# Altium PCB PCB1.PcbDoc
Units mil, origin at the board's own origin, x right, y up, seen from the top; angles counter-clockwise.
Board outline 2195 x 2205 mil, 2 copper layers (Top Layer, Bottom Layer); 21 components, 14 nets, 72 pads, 0 vias.
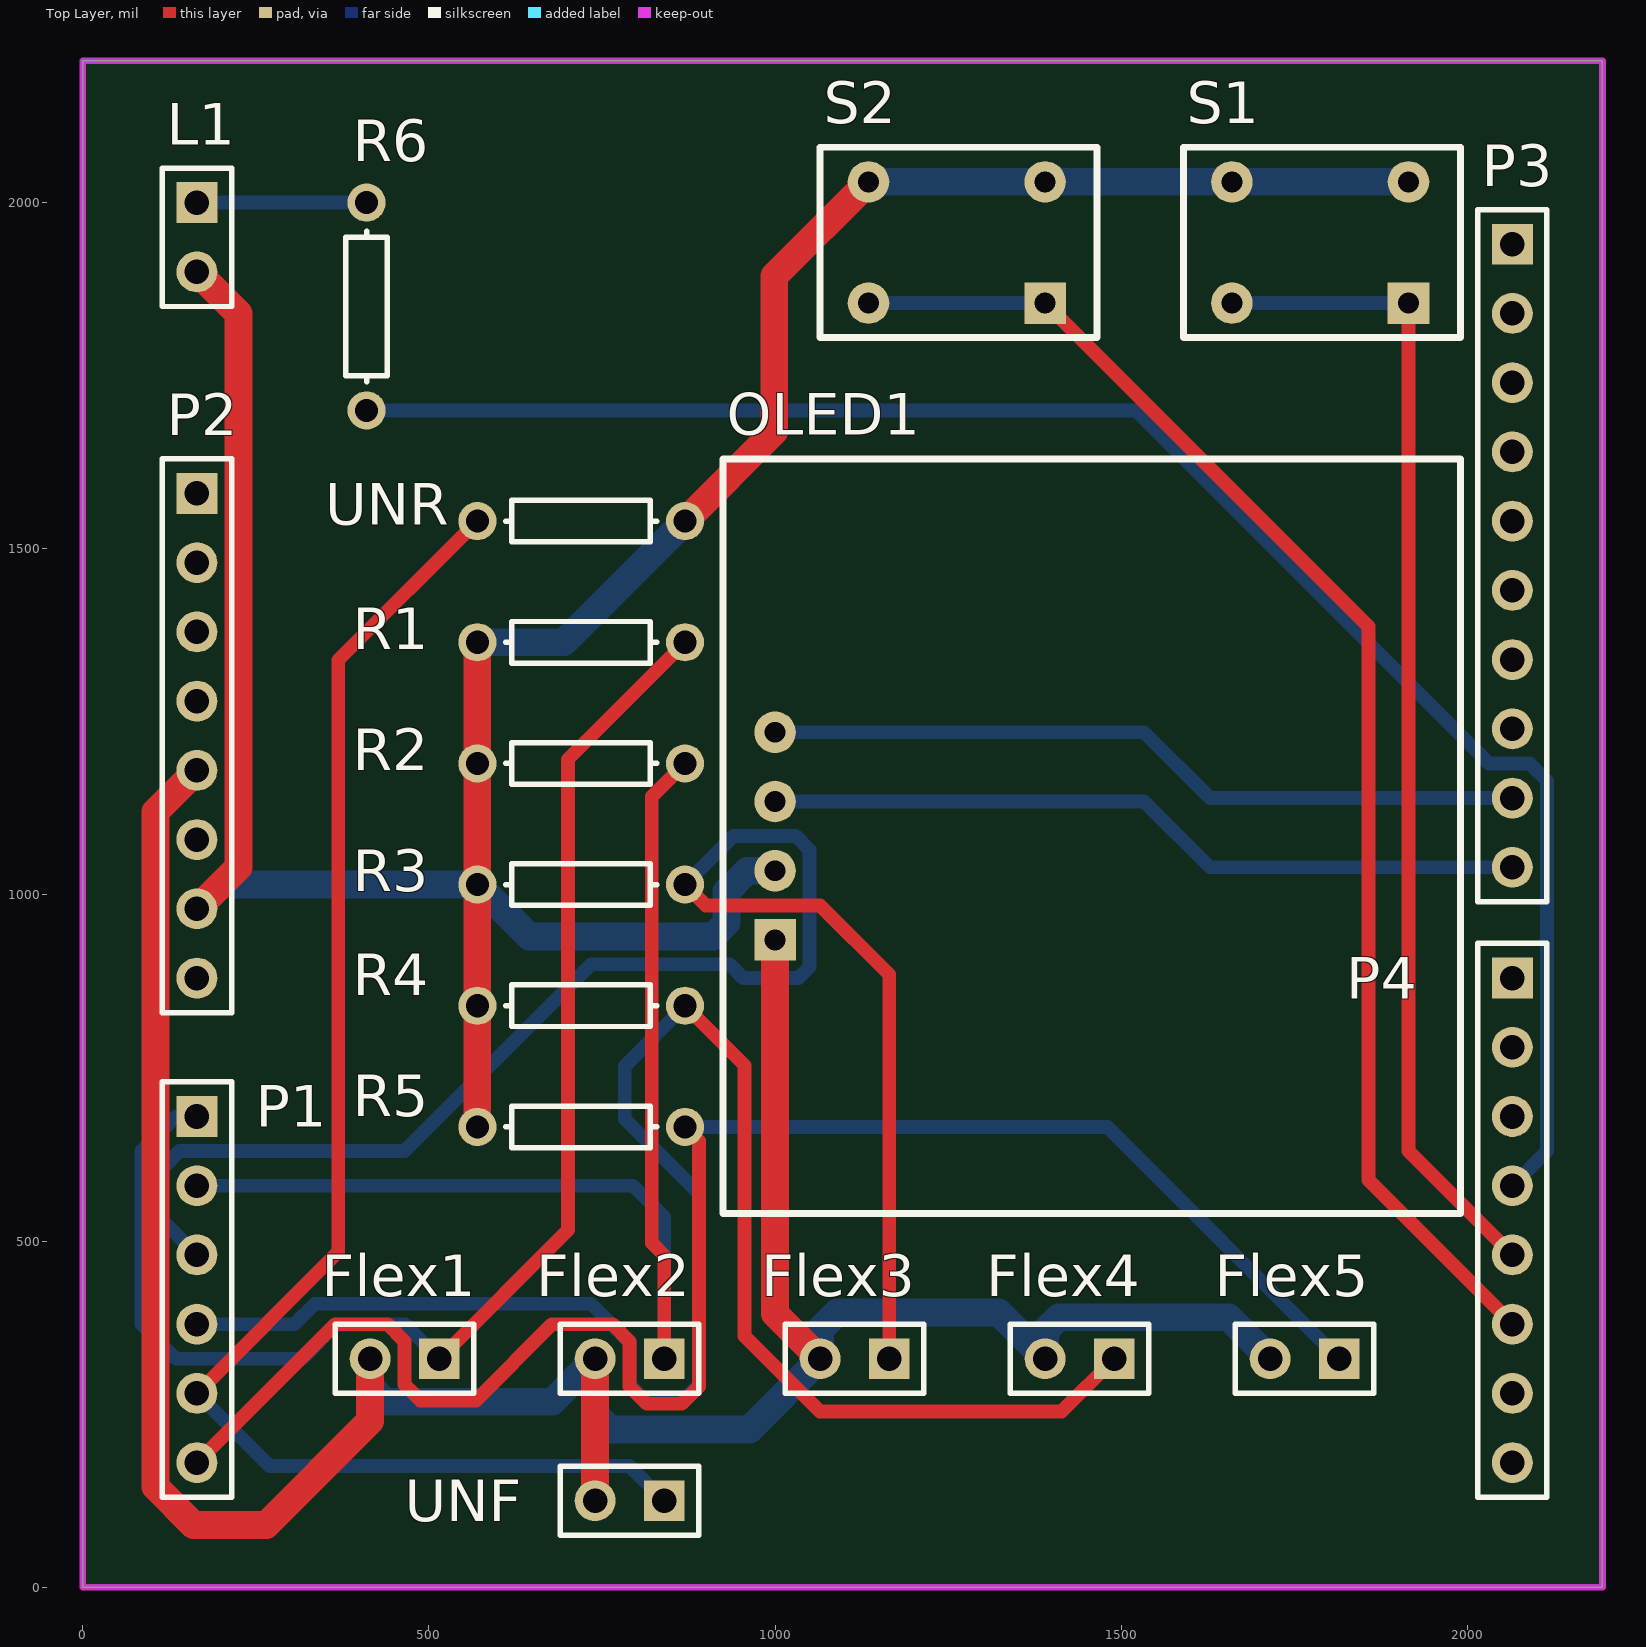
[diagram p0: Top Layer view]
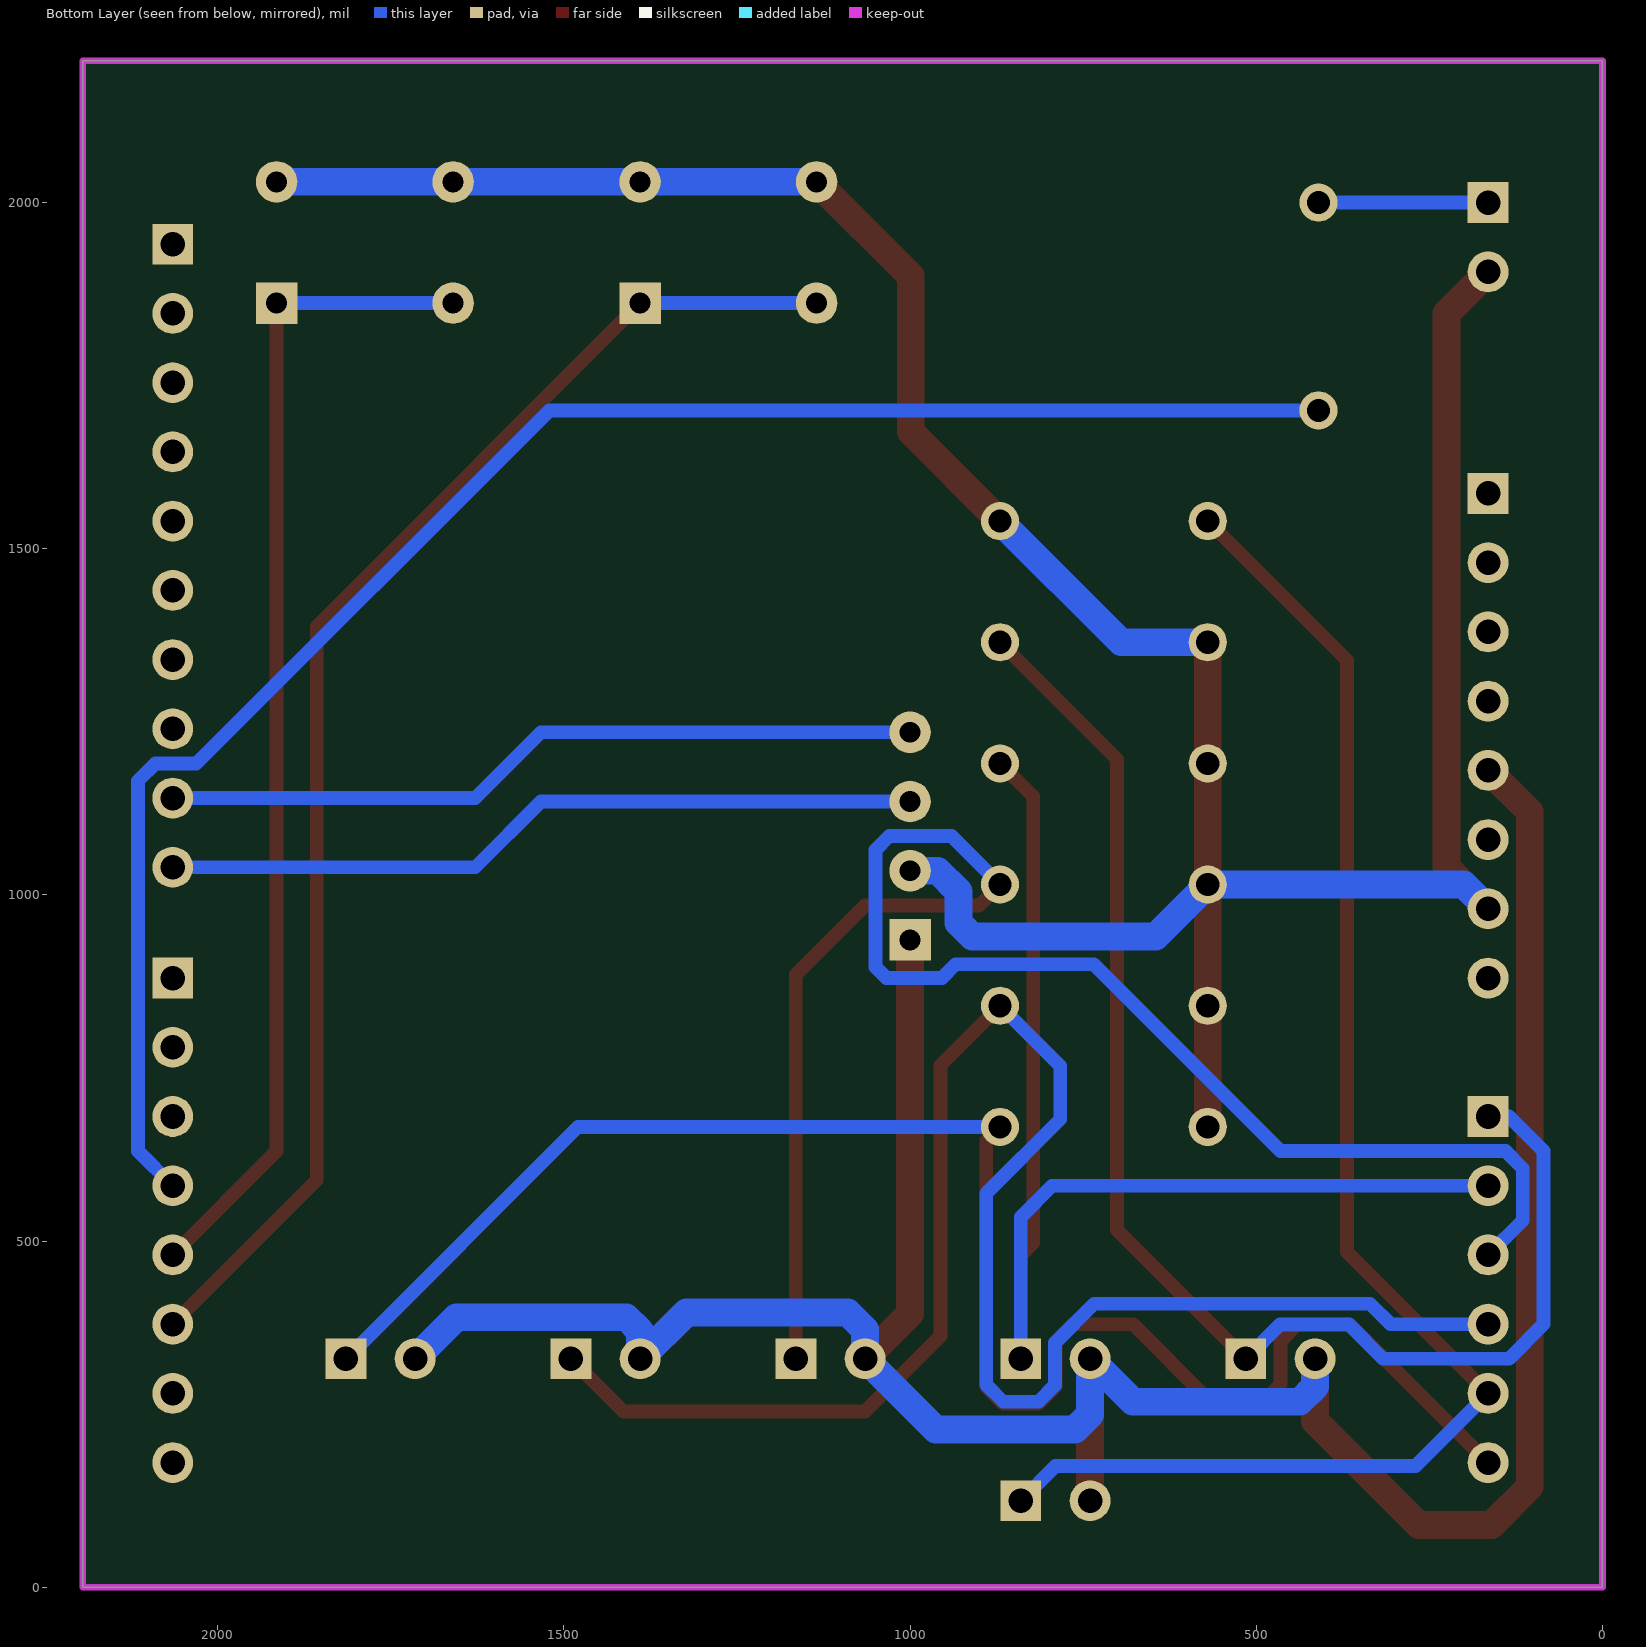
[diagram p1: Bottom Layer view, seen from below]

## Layer stack, top to bottom
Top Solder: solder mask 0.4, Solder Resist, Dk 3.5
Top Layer: signal copper 1.4
Dielectric 1: dielectric 12.6, FR-4, Dk 4.8
Bottom Layer: signal copper 1.4
Bottom Solder: solder mask 0.4, Solder Resist, Dk 3.5

## Board outline
0,0 0,2205 2195,2205 2195,0

## Design rules (kind name [scope] priority, off if disabled: settings)
Clearance [All] p1: gap=10 ignorepadtopadclearanceinfootprint=FALSE except(0: Arc-Hole Track-Hole SMDPad-Hole THPad-Hole Via-Hole Fill-Hole Poly-Hole Region-Hole Text-Hole)
PolygonConnect [All] p1: connectstyle=Relief reliefconductorwidth=10 reliefentries=4 polygonreliefangle="90 Angle" airgapwidth=10
RoutingVias [All] p1: holewidth=28 width=50 viastyle="Through Hole" minholewidth=28 minwidth=50 maxholewidth=28 maxwidth=50
SolderMaskExpansion [All] p1: expansion=4
Width Width_1 [InNet('5V')] p1: maxlimit=40 minlimit=40 preferedwidth=40 minimp=50.000000 maximp=50.000000 favimp=50.000000
Width Width_2 [InNet('GND')] p2: maxlimit=40 minlimit=40 preferedwidth=40 minimp=50.000000 maximp=50.000000 favimp=50.000000
Width [All] p3: maxlimit=20 minlimit=20 preferedwidth=20 minimp=50.000000 maximp=50.000000 favimp=50.000000
30 further rules are at their usual default settings.

## Components (designator, comment, footprint, x,y, rotation, side; value= is the part's Value field where it differs from the comment)
Flex1 "Header 2" HDR1X2 515,330 r180 top
Flex2 "Header 2" HDR1X2 840,330 r180 top
Flex3 "Header 2" HDR1X2 1165,330 r180 top
Flex4 "Header 2" HDR1X2 1490,330 r180 top
Flex5 "Header 2" HDR1X2 1815,330 r180 top
L1 "LED2" HDR1X2 165,2000 r270 top
OLED1 "OLED" OLED 1000,935 r90 top
P1 "Header 6" HDR1X6 165,680 r270 top
P2 "Header 8" HDR1X8 165,1580 r270 top
P3 "Header 10" HDR1X10 2065,1940 r270 top
P4 "Header 8" HDR1X8 2065,880 r270 top
R1 "Res1" AXIAL-0.3 720,1365 r0 top value=22K
R2 "Res1" AXIAL-0.3 720,1190 r0 top value=22K
R3 "Res1" AXIAL-0.3 720,1015 r0 top value=22K
R4 "Res1" AXIAL-0.3 720,840 r0 top value=22K
R5 "Res1" AXIAL-0.3 720,665 r0 top value=22K
R6 "Res1" AXIAL-0.3 410,1850 r90 top value=3.3K
S1 "switch" switch 1915,1855 r180 top
S2 "switch" switch 1390,1855 r180 top
UNF "Header 2" HDR1X2 840,125 r180 top
UNR "Res1" AXIAL-0.3 720,1540 r180 top value=22K

## Footprints (in the part's own frame and the unit in brackets; to place one, negate y for a bottom-side part, rotate by r counter-clockwise, add the part's x,y. Pads: shape width x height; smd on the part's side, far side on the other; paste and mask are expansions set on the pad)
AXIAL-0.3 [mm] "Axial Device, Thru-Hole; 2 Leads; 0.3 in Pin Spacing"
  round 1.4 hole 0.85: 1(-3.81,0) 2(3.81,0)
  silkscreen extent -2.77,-0.76 2.77,0.76
HDR1X2 [mm] "Connector; Header; 2 Position"
  rect 1.5x1.5 hole 0.9: 1(0,0)
  round 1.5 hole 0.9: 2(2.54,0)
  silkscreen extent -1.27,-1.27 3.81,1.27
HDR1X6 [mm] "Connector; Header; 6 Position"
  rect 1.5x1.5 hole 0.9: 1(0,0)
  round 1.5 hole 0.9: 2(2.54,0) 3(5.08,0) 4(7.62,0) 5(10.16,0) 6(12.7,0)
  silkscreen extent -1.27,-1.27 13.97,1.27
HDR1X8 [mm] "Connector; Header; 8 Position"
  rect 1.5x1.5 hole 0.9: 1(0,0)
  round 1.5 hole 0.9: 2(2.54,0) 3(5.08,0) 4(7.62,0) 5(10.16,0) 6(12.7,0) 7(15.24,0) 8(17.78,0)
  silkscreen extent -1.27,-1.27 19.05,1.27
HDR1X10 [mm] "Connector; Header; 10 Position"
  rect 1.5x1.5 hole 0.9: 1(0,0)
  round 1.5 hole 0.9: 2(2.54,0) 3(5.08,0) 4(7.62,0) 5(10.16,0) 6(12.7,0) 7(15.24,0) 8(17.78,0) 9(20.32,0) 10(22.86,0)
  silkscreen extent -1.27,-1.27 24.13,1.27
OLED [mil]
  rect 60x60 hole 30: 1(0,0)
  round 60 hole 30: 2(100,0) 3(200,0) 4(300,0)
  silkscreen extent -395,-990 695,75
switch [mil]
  rect 60x60 hole 30: 1(0,0)
  round 60 hole 30: 2(0,-175) 3(255,-175) 4(255,0)
  silkscreen extent -75,-225 325,50

## Part data
Flex1 Flex2 Flex3 Flex4 Flex5 UNF: "Header, 2-Pin", LatestRevisionDate=17-Jul-2002, LatestRevisionNote="Re-released for DXP Platform.", Publisher="Altium Limited"
L1: library part "Header 2", "Header, 2-Pin", LatestRevisionDate=17-Jul-2002, LatestRevisionNote="Re-released for DXP Platform.", Publisher="Altium Limited"
P1: "Header, 6-Pin", LatestRevisionDate=17-Jul-2002, LatestRevisionNote="Re-released for DXP Platform.", Publisher="Altium Limited"
P2 P4: "Header, 8-Pin", LatestRevisionDate=17-Jul-2002, LatestRevisionNote="Re-released for DXP Platform.", Publisher="Altium Limited"
P3: "Header, 10-Pin", LatestRevisionDate=17-Jul-2002, LatestRevisionNote="Re-released for DXP Platform.", Publisher="Altium Limited"
R1 R2 R3 R4 R5 R6 UNR: "Resistor", LatestRevisionDate=17-Jul-2002, LatestRevisionNote="Re-released for DXP Platform.", PackageDescription="Axial Device, Thru-Hole; 2 Leads; 0.3 in Pin Spacing", PackageReference=AXIAL-0.3, Published=8-Jun-2000, Publisher="Altium Limited"

## Nets (pads, with @x,y where several pads share a name; then routed paths per layer and width w, separated by ;. In a path a pad name is that pad's centre, name@x,y a point inside that pad or via, vN(x,y) a via of type N, cw(c..) or ccw(c..) an arc to the next point about the centre after c; other vN are vias at no path point)
5V: Flex1.2 Flex2.2 Flex3.2 Flex4.2 Flex5.2 OLED1.1 P2.5 UNF.2 | length 4041.3
  Top Layer w40: P2.5 105,1120 105,145 160,90 265,90 415,240 Flex1.2 ; UNF.2 Flex2.2 ; OLED1.1 1000,395 Flex3.2
  Bottom Layer w40: Flex1.2 415,290 437,268 678,268 Flex2.2 740,249.63 761.63,228 963,228 Flex3.2 1065,372 1090,397 1323,397 Flex4.2 1390,370 1410,390 1655,390 Flex5.2
A0: Flex1.1 P1.1 R1.2 | length 2024.5
  Top Layer w20: Flex1.1 701,516 701,1196 R1.2
  Bottom Layer w20: P1.1 135,680 85,630 85,380 135,330 316.47,330 366,379.53 465.47,379.53 Flex1.1
A1: Flex2.1 P1.2 R2.2 | length 1786
  Top Layer w20: Flex2.1 840,479 822,497 822,1142 R2.2
  Bottom Layer w20: P1.2 795,580 840,535 Flex2.1
A2: Flex3.1 P1.3 R3.2 | length 2507.9
  Top Layer w20: R3.2 900,985 1065,985 1165,885 Flex3.1
  Bottom Layer w20: P1.3 115,530 115,605 140,630 465,630 735,900 934,900 954,880 1034,880 1050,896 1050,1065 1030,1085 940,1085 R3.2
A3: Flex4.1 P1.4 R4.2 | length 2592.7
  Top Layer w20: R4.2 956,754 956,363 1065,254 1414,254 Flex4.1
  Bottom Layer w20: P1.4 305.94,380 335.47,409.53 734,409.53 790.47,353.06 790.47,292.19 814.66,268 865.34,268 890,292.66 890,569 783,676 783,753 R4.2
A4: P1.5 UNF.1 UNR.2 | length 2167
  Top Layer w20: P1.5 369,484 369,1339 UNR.2
  Bottom Layer w20: P1.5 270,175 790,175 UNF.1
A5: Flex5.1 P1.6 R5.2 | length 2498.6
  Top Layer w20: P1.6 365,380 440,380 465,355 465,292.66 487.66,270 568,270 678,380 765,380 790,355 790,290 815,265 865,265 890,290 890,645 R5.2
  Bottom Layer w20: R5.2 1480,665 Flex5.1
GND: L1.2 OLED1.2 P2.7 R1.1 R2.1 R3.1 R4.1 R5.1 S1.2 S1.3 S2.2 S2.3 UNR.1 | length 4368.2
  Top Layer w40: P2.7 225,1040 225,1840 L1.2 ; R5.1 R4.1 R3.1 R2.1 R1.1 ; UNR.1 999,1669 999,1894 S2.3
  Bottom Layer w40: P2.7 200,1015 R3.1 645,940 910,940 930,960 930,1005 960,1035 OLED1.2 ; R1.1 695,1365 UNR.1 ; S2.3 S2.2 S1.3 S1.2
NetL1_1: L1.1 R6.2 | length 245
  Bottom Layer w20: L1.1 R6.2
P2: P4.6 S2.1 S2.4 | length 2009.6
  Top Layer w20: S2.1 1857,1388 1857,588 P4.6
  Bottom Layer w20: S2.4 S2.1
P3: P4.5 S1.1 S1.4 | length 1692.1
  Top Layer w20: S1.1 1915,630 P4.5
  Bottom Layer w20: S1.4 S1.1
P4: P4.4 R6.1 | length 2532.3
  Bottom Layer w20: R6.1 1521,1700 2031,1190 2090,1190 2115,1165 2115,630 P4.4
SCL: OLED1.3 P3.10 | length 1104.4
  Bottom Layer w20: OLED1.3 1533,1135 1628,1040 P3.10
SDA: OLED1.4 P3.9 | length 1104.4
  Bottom Layer w20: OLED1.4 1533,1235 1628,1140 P3.9
pads on no net: P2.1 P2.2 P2.3 P2.4 P2.6 P2.8 P3.1 P3.2 P3.3 P3.4 P3.5 P3.6 P3.7 P3.8 P4.1 P4.2 P4.3 P4.7 P4.8

## Keep-outs
Keep-Out Layer:
  the board outline again, w10